# Altium PCB BRD170127.pcbdoc
Units mm, origin at the board's own origin, x right, y up, seen from the top; angles counter-clockwise.
Board outline 209.55 x 160.58 mm, 2 copper layers (Top Layer, Bottom Layer); 41 components, 24 nets, 107 pads, 11 vias.
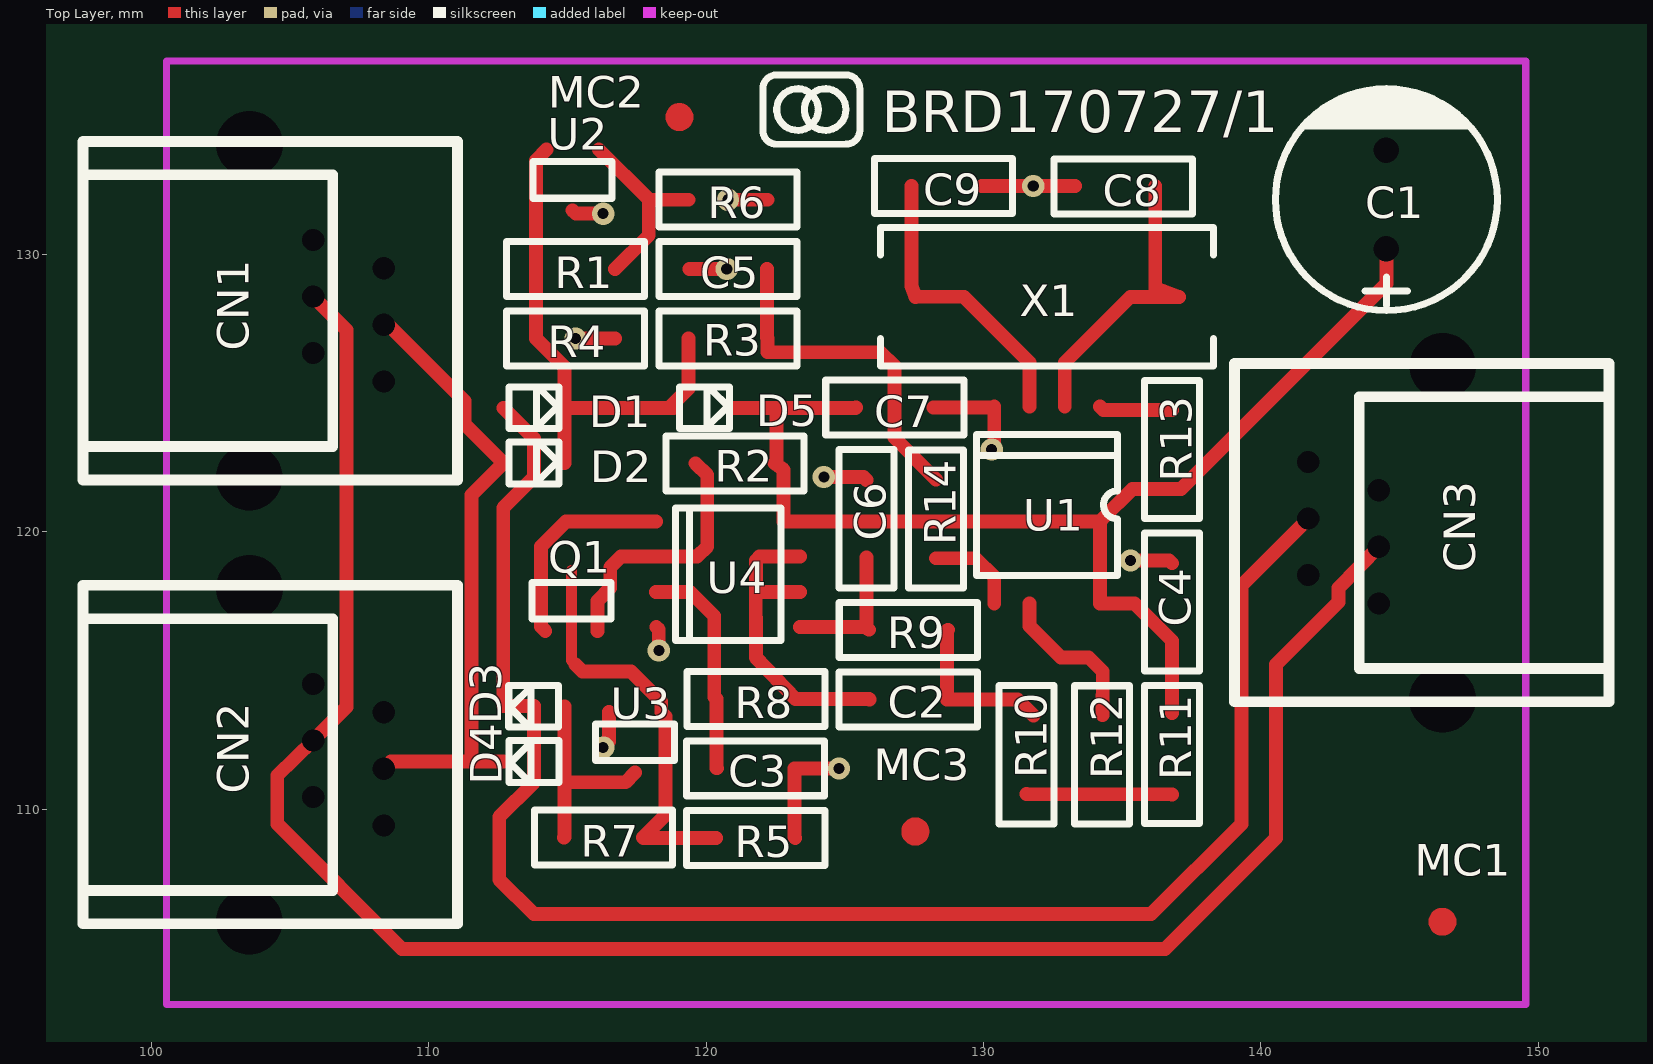
[diagram p0: Top Layer view]
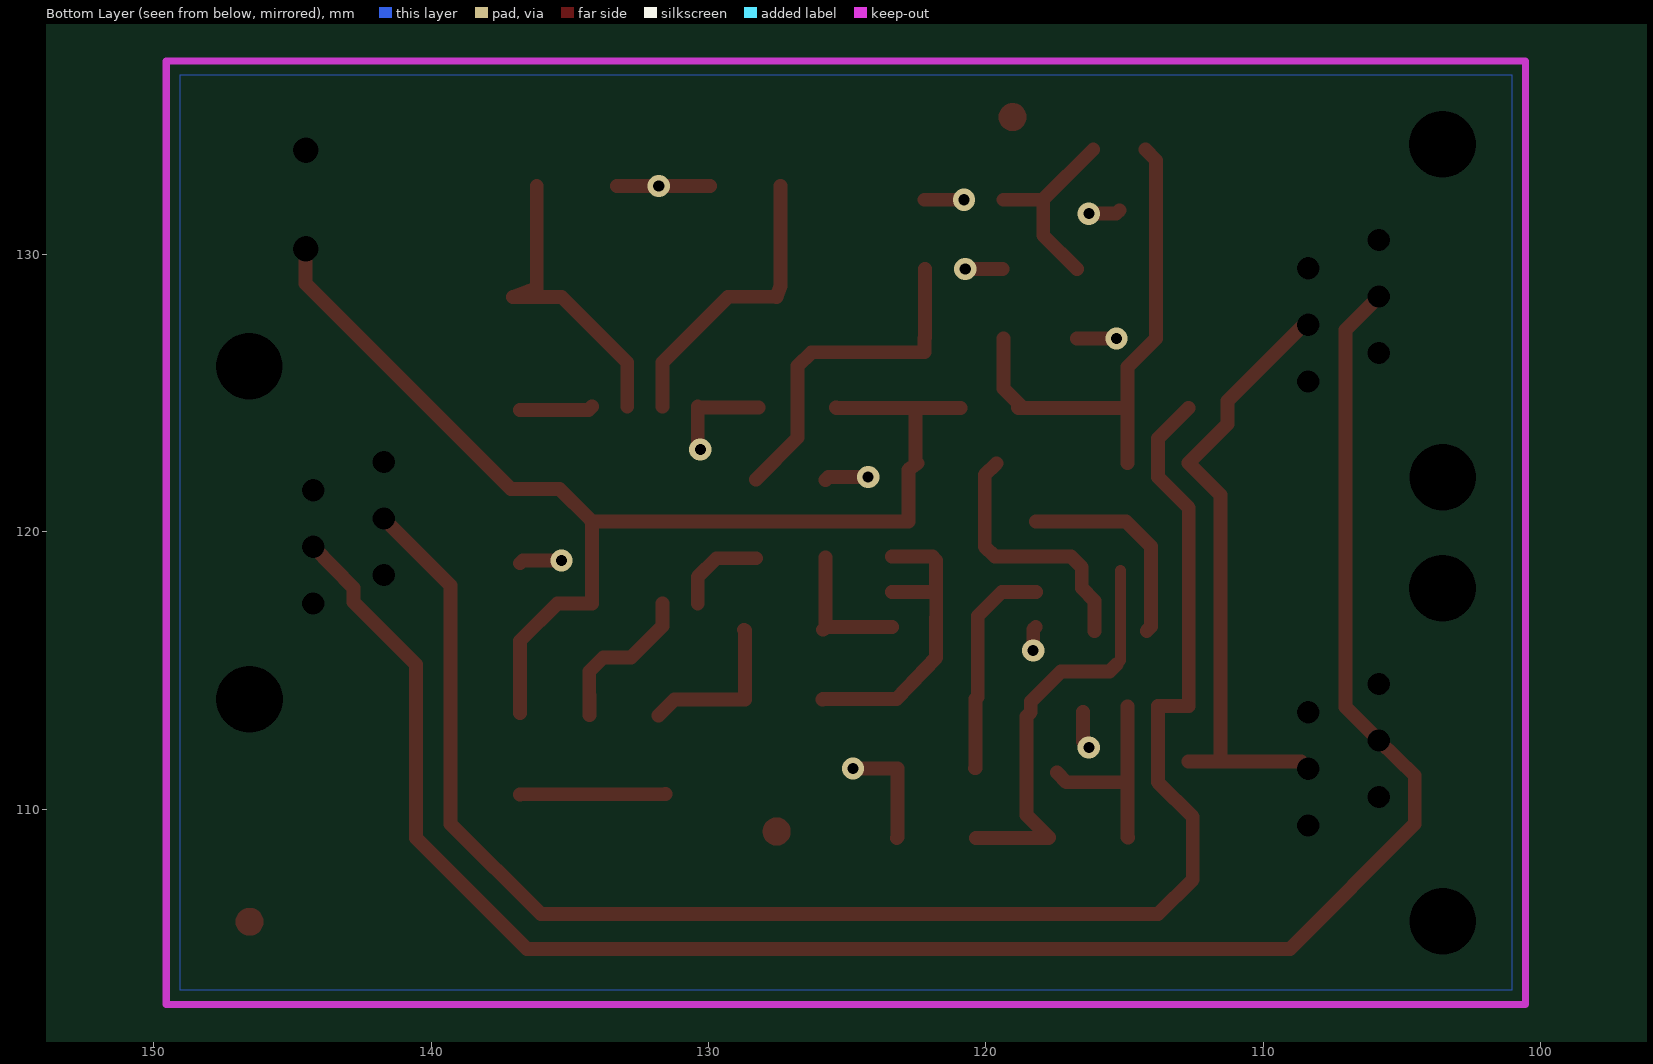
[diagram p1: Bottom Layer view, seen from below]

## Layer stack, top to bottom
Top Layer: signal copper (thickness not stored)
Dielectric: dielectric 0.32, FR-4, Dk 4.8
Bottom Layer: signal copper (thickness not stored)

## Board outline
234.95,25.4 25.4,25.4 25.4,185.981 234.95,185.981

## Components (designator, comment, footprint, x,y, rotation, side; value= is the part's Value field where it differs from the comment)
C1 "CAP-D8.0XF3.5" CAP-D8.0XF3.5 144.523,131.975 r90 top
C2 "CA_1206" CA_1206 127.289,113.964 r0 top
C3 "CA_1206" CA_1206 121.787,111.478 r0 top
C4 "CA_1206" CA_1206 136.796,117.469 r90 top
C5 "CA_1206" CA_1206 120.794,129.471 r180 top
C6 "CA_1206" CA_1206 125.785,120.472 r90 top
C7 "CA_1206" CA_1206 126.804,124.477 r0 top
C8 "CA_1206" CA_1206 135.039,132.453 r180 top
C9 "CA_1206" CA_1206 128.557,132.468 r0 top
CN1 "6P6C" 6P6C#1 103.543,127.972 r270 top
CN2 "6P6C" 6P6C#1 103.543,111.97 r270 top
CN3 "6P6C" 6P6C#2 146.547,119.971 r90 top
D1 "DI_SOD123W" DI_SOD123W 113.794,124.467 r180 top
D2 "DI_SOD123W" DI_SOD123W 113.794,122.481 r180 top
D3 "DI_SOD123W" DI_SOD123W 113.789,113.713 r0 top
D4 "DI_SOD123W" DI_SOD123W 113.799,111.721 r0 top
D5 "DI_SOD123W" DI_SOD123W 119.941,124.472 r180 top
MC1 "MC_FIDUCIAL" MC_FIDUCIAL 146.542,105.945 r0 top
MC2 "MC_FIDUCIAL" MC_FIDUCIAL 119.042,134.95 r0 top
MC3 "MC_FIDUCIAL" MC_FIDUCIAL 127.543,109.199 r0 top
Q1 "SC_SOT23-3" SC_SOT23-3 115.545,117.72 r0 top
R1 "RE_1206" RE_1206 115.295,129.471 r180 top
R2 "RE_1206" RE_1206 121.046,122.471 r0 top
R3 "RE_1206" RE_1206 120.794,126.972 r180 top
R4 "RE_1206" RE_1206 115.293,126.969 r180 top
R5 "RE_1206" RE_1206 121.792,108.963 r0 top
R6 "RE_1206" RE_1206 120.794,131.973 r180 top
R7 "RE_1206" RE_1206 116.306,108.981 r0 top
R8 "RE_1206" RE_1206 121.795,113.969 r0 top
R9 "RE_1206" RE_1206 127.292,116.466 r0 top
R10 "RE_1206" RE_1206 131.546,111.965 r270 top
R11 "RE_1206" RE_1206 136.794,111.97 r90 top
R12 "RE_1206" RE_1206 134.274,111.963 r90 top
R13 "RE_1206" RE_1206 136.799,122.971 r270 top
R14 "RE_1206" RE_1206 128.292,120.467 r270 top
U1 "SC_SO08_208MIL_BODY" SC_SO08_208MIL_BODY 132.295,120.972 r270 top
U2 "SC_SOT23-3" SC_SOT23-3 114.794,132.484 r180 top
U3 "SC_SOT23-3" SC_SOT23-3 117.044,112.212 r180 top
U4 "SC_SO08_150MIL_BODY" SC_SO08_150MIL_BODY 120.797,118.473 r0 top
X1 "XT_HC49/US" XT_HC49/US 132.295,128.47 r180 top
? "MC_FRAME_A5" MC_FRAME_A5 130.548,105.219 r0 top

## Footprints (in the part's own frame and the unit in brackets; to place one, negate y for a bottom-side part, rotate by r counter-clockwise, add the part's x,y. Pads: shape width x height; smd on the part's side, far side on the other; paste and mask are expansions set on the pad)
6P6C#1 [mm]
  round 0 hole 0.8: 1(2.55,4.841) 2(1.529,2.301) 3(0.511,4.839) 4(-0.511,2.299) 5(-1.529,4.841) 6(-2.55,2.301)
  round 0 hole 2.4 unplated: ""(-5.999,0.003) ""(5.999,0)
  silkscreen extent -6.1,-6 6.1,7.5
6P6C#2 [mm]
  round 0 hole 0.8: 1(2.55,4.839) 2(1.529,2.299) 3(0.511,4.839) 4(-0.511,2.299) 5(-1.529,4.839) 6(-2.55,2.299)
  round 0 hole 2.4 unplated: ""(-5.999,0.003) ""(5.999,0)
  silkscreen extent -6.1,-6 6.1,7.5
CA_1206 [mil]
  round 0 smd: 1(-55,0) 2(55,0)
  silkscreen extent -98,-39 98,39
CAP-D8.0XF3.5 [mil]
  round 0 hole 36: 1(-70,0) 2(70,0)
  silkscreen extent -158,-158 160,158
DI_SOD123W [mm]
  round 0 smd: A(1.1,0) C(-1.1,0)
  silkscreen extent -0.9,-0.75 0.9,0.75
MC_FIDUCIAL [mm]
  Top Layer lines w0.5: -0.254,0 cw(c0,0) 0.254,0 cw(c0,0) -0.254,0
MC_FRAME_A5 [mm]
RE_1206 [mil]
  round 0 smd: 1(-56,0) 2(56,0)
  silkscreen extent -98,-39 98,39
SC_SO08_150MIL_BODY [mil]
  round 0 smd: 1(-102,75) 2(-102,25) 3(-102,-25) 4(-102,-75) 5(102,-75) 6(102,-25) 7(102,25) 8(102,75)
  silkscreen extent -75,-94 75,94
SC_SO08_208MIL_BODY [mm]
  round 0 smd: 1(-3.551,1.905) 2(-3.551,0.635) 3(-3.551,-0.635) 4(-3.551,-1.905) 5(3.551,-1.905) 6(3.551,-0.635) 7(3.551,0.635) 8(3.551,1.9)
  silkscreen extent -2.54,-2.54 2.54,2.54
SC_SOT23-3 [mm]
  round 0 smd: 1(-1.34,-1.292) 2(0.54,-1.292) 3(-0.4,0.892)
  silkscreen extent -1.82,-0.86 1.02,0.46
XT_HC49/US [mil]
  round 0 smd: 1(-187,0) 2(187,0)
  silkscreen extent -236,-98 236,98

## Via types
v1: diameter 0.8, hole 0.4, Top Layer to Bottom Layer, 11 vias

## Nets (pads, with @x,y where several pads share a name; then routed paths per layer and width w, separated by ;. In a path a pad name is that pad's centre, name@x,y a point inside that pad or via, vN(x,y) a via of type N, cw(c..) or ccw(c..) an arc to the next point about the centre after c; other vN are vias at no path point)
$BoardOutlineNet: 
CN2_3: CN1.3 CN2.3 D2.A D4.C | length 23.3
  Top Layer w0.5: CN2.3 108.643,111.721 D4.C ; CN1.3 108.555,127.462 111.295,124.721 ; 111.295,123.971 111.295,124.721 ; 111.545,111.722 111.545,119.721 111.545,121.332 D2.A 111.295,123.88 111.295,124.721
CN2_4: CN1.4 CN2.4 CN3.4 | length 72.1
  Top Layer w0.5: CN1.4 107.046,127.279 107.046,125.721 107.046,113.685 CN2.4 104.546,111.211 104.546,109.471 109.047,104.97 136.545,104.97 140.545,108.971 140.545,115.221 142.795,117.471 142.795,117.971 CN3.4
CN3_3: CN3.3 D1.A D3.C | length 60.2
  Top Layer w0.5: D1.A 113.795,123.366 113.795,121.971 112.689,120.865 D3.C 112.697,113.72 113.797,113.72 ; 113.795,113.721 113.797,110.972 112.544,109.722 112.544,107.472 113.797,106.222 136.044,106.222 139.296,109.471 139.296,118.069 CN3.3
GND: C1.2 C3.2 C4.2 C5.2 C6.2 C7.2 C8.2 C9.2 R4.1 R5.2 R6.1 U1.4 U2.3 U3.2 U4.4 | length 22
  Top Layer w0.5: 115.193,131.591 115.313,131.471 v1(116.293,131.467) ; v1@115.296,126.97 R4.1 ; v1(116.293,112.232) 116.504,112.443 U3.2 ; U4.4 118.297,116.476 v1(118.297,115.719) ; C5.2 C5.2 v1(120.746,129.468) ; v1@120.796,131.971 122.216,131.971 ; 123.214,108.962 123.184,108.992 C3.2 123.192,111.471 v1@124.796,111.471 ; v1(124.246,121.98) 125.68,121.971 125.785,121.866 ; 128.2,124.476 130.344,124.476 130.39,124.522 130.39,123.064 v1(130.296,122.969) ; C9.2 131.792,132.468 v1(131.795,132.471) 133.296,132.471 ; v1(135.295,118.971) 136.692,118.971 C4.2
  other v1: 124.797,111.47 115.295,126.972 120.797,131.97
R3_1: C5.1 R3.1 R14.1 | length 12.5
  Top Layer w0.5: C5.1 122.191,126.996 122.216,126.97 122.216,126.471 126.295,126.471 126.796,125.971 126.796,123.392 128.294,121.893
R9_2: C2.2 R9.2 R10.1 | length 5.9
  Top Layer w0.5: 128.716,116.47 128.686,116.439 128.686,113.963 131.226,113.963 131.802,113.386
R10_2: R10.2 R11.1 R12.1 | length 5.5
  Top Layer w0.5: 131.802,110.542 131.545,110.549 136.796,110.536
R12_2: R12.2 U1.6 | length 5.7
  Top Layer w0.5: 131.66,117.42 131.66,116.607 132.796,115.471 133.796,115.471 134.299,114.968 134.295,113.394
R13_1: R13.1 U1.1 | length 2.6
  Top Layer w0.5: 134.2,124.522 134.329,124.392 136.796,124.392
R14_2: R14.2 U1.5 | length 3.3
  Top Layer w0.5: 128.294,119.048 129.719,119.048 130.39,118.377 130.39,117.42
S$728: 
U2_1: R1.1 R6.2 U2.1 | length 7
  Top Layer w0.5: 116.133,133.775 117.936,131.972 119.371,131.972 ; R1.1 117.937,130.69 117.937,131.97
U3_1: Q1.3 R5.1 R7.2 U3.1 | length 15.4
  Top Layer w0.4: Q1.3 115.145,115.371 115.547,114.97
  Top Layer w0.5: 115.295,115.221 115.545,114.971 117.295,114.971 118.384,113.883 U3.1 118.545,113.343 118.545,110.471 118.545,109.798 R7.2 117.746,108.963 R5.1
U4_1: Q1.1 U4.1 | length 7.6
  Top Layer w0.5: Q1.1 114.045,116.588 114.045,119.471 114.952,120.378 U4.1
U4_2: Q1.2 R2.1 U4.2 | length 9.5
  Top Layer w0.5: Q1.2 116.085,117.511 116.545,117.971 116.545,118.721 116.795,118.971 116.932,119.108 U4.2 119.682,119.108 120.045,119.471 120.045,122.049 R2.1
U4_3: C3.1 R8.1 U4.3 | length 8
  Top Layer w0.5: 118.203,117.836 119.43,117.836 120.296,116.971 120.296,114.052 120.377,113.972 ; 120.377,113.971 120.377,111.492 C3.1
U4_5: C6.1 R9.1 U4.5 | length 5.2
  Top Layer w0.5: 123.387,116.566 125.775,116.566 125.871,116.47 125.787,116.554 125.786,119.073
U4_7: C2.1 R8.2 U4.6 U4.7 | length 12
  Top Layer w0.5: 121.792,118.479 121.795,115.472 123.221,113.972 125.884,113.971 125.892,113.963 ; 123.387,117.836 121.927,117.836 121.795,117.969 121.795,118.97 121.796,118.971 121.931,119.106 123.387,119.106
VCC: D1.C D2.C D5.A R1.2 R3.2 R4.2 U2.2 | length 18.6
  Top Layer w0.5: 113.872,129.47 113.872,133.394 114.253,133.775 ; R1.2 113.87,129.468 R4.2 114.894,125.945 D1.C ; D2.C D1.C ; 118.673,124.466 119.371,125.164 119.371,126.97 ; D5.A 118.836,124.467 D1.C
VDD: C1.1 C4.1 C7.1 D5.C R2.2 R11.2 R13.2 U1.8 U4.8 | length 44.2
  Top Layer w0.5: 120.908,124.466 125.396,124.466 125.406,124.476 ; R2.2 122.795,122.233 122.795,120.376 123.387,120.376 134.202,120.376 134.296,120.47 ; R2.2 122.544,122.471 122.544,124.465 ; 136.796,113.471 C4.1 135.45,117.42 134.195,117.42 134.195,120.37 134.296,120.471 ; 143.773,128.197 137.123,121.547 136.796,121.547 135.372,121.547 134.296,120.471 ; 143.774,128.196 144.523,128.945 C1.1
VEE: D3.A D4.A R7.1 U3.3 | length 7.4
  Top Layer w0.5: R7.1 114.901,108.999 114.901,111.721 114.901,113.7 D3.A ; 114.901,110.972 117.096,110.972 U3.3
X1_1: C8.1 U1.2 X1.1 | length 11.3
  Top Layer w0.5: 132.931,124.522 132.93,126.105 135.29,128.465 X1.1 136.194,128.781 136.194,132.467
X1_2: C9.1 U1.3 X1.2 | length 10.7
  Top Layer w0.5: 127.4,132.469 127.4,128.852 X1.2 ; X1.2 129.295,128.471 130.796,126.971 131.66,126.107 131.66,124.522
pads on no net: CN1. CN1.1 CN1.2 CN1.5 CN1.6 CN2. CN2.1 CN2.2 CN2.5 CN2.6 CN3. CN3.1 CN3.2 CN3.5 CN3.6 U1.7

## Polygon pours and split planes (outlines as drawn)
GND on Bottom Layer (solid): 101.046,136.471 101.046,103.471 149.045,103.471 149.045,136.471 101.046,136.471

## Silkscreen, mask and mechanical layers (free items; w line width, h text height)
Top Overlay:
  circle w0.254: c124.294,135.221 r0.749
  circle w0.254: c123.296,135.221 r0.749
  lines w0.25 net S$728: 122.539,136.47 125.045,136.47 ; 122.545,133.971 125.046,133.972 ; 122.546,133.97 cw(c122.546,134.47) 122.046,134.47 122.046,135.97 cw(c122.546,135.97) 122.546,136.47 ; 125.042,133.972 ccw(c125.042,134.472) 125.542,134.472 ; 125.043,136.47 cw(c125.043,135.97) 125.543,135.97 ; 125.546,134.47 125.546,135.97
  text "BRD170727/1" at 126.331,134.395 h1.5
Mechanical 15:
  lines w0.25: 92.545,136.971 99.545,136.971
  lines w0.3: 92.545,102.971 99.545,102.971 ; 100.545,135.971 100.545,136.971 ; 100.545,137.971 100.545,140.971 ; 149.545,137.971 149.545,140.971 ; 100.545,136.971 100.545,102.971 149.545,102.971 149.545,136.971 100.545,136.971

## Text inside footprints (layer, text, board x,y; h text height)
?: Mechanical 15 "A" at 40.66,153.024 h1.27; Mechanical 15 "C" at 221,85.714 h1.27; Mechanical 15 "1" at 59.71,168.264 h1.27; Mechanical 15 "1" at 59.71,38.724 h1.27; Mechanical 15 "2" at 102.89,38.724 h1.27; Mechanical 15 "2" at 102.89,168.264 h1.27; Mechanical 15 "3" at 147.34,168.264 h1.27; Mechanical 15 "3" at 147.34,38.724 h1.27; Mechanical 15 "4" at 195.6,38.724 h1.27; Mechanical 15 "4" at 195.6,168.264 h1.27; Mechanical 15 "A" at 219.73,153.024 h1.27; Mechanical 15 "B" at 39.39,120.004 h1.27; Mechanical 15 "B" at 219.73,120.004 h1.27; Mechanical 15 "C" at 39.39,85.714 h1.27; Mechanical 15 "C" at 219.73,85.714 h1.27; Mechanical 15 "D" at 39.39,53.964 h1.27; Mechanical 15 "D" at 219.73,53.964 h1.27; Mechanical 15 "BRD170127/1" at 177.82,52.694 h1.27; Mechanical 15 "Revision:" at 177.82,42.534 h1.27; Mechanical 15 "1" at 189.25,42.534 h1.27; Mechanical 15 "PULSE-DTMF-CONVERTER" at 177.82,57.774 h1.27